# EAGLE board BuildUpon Panel (EAGLE 7.7.0)
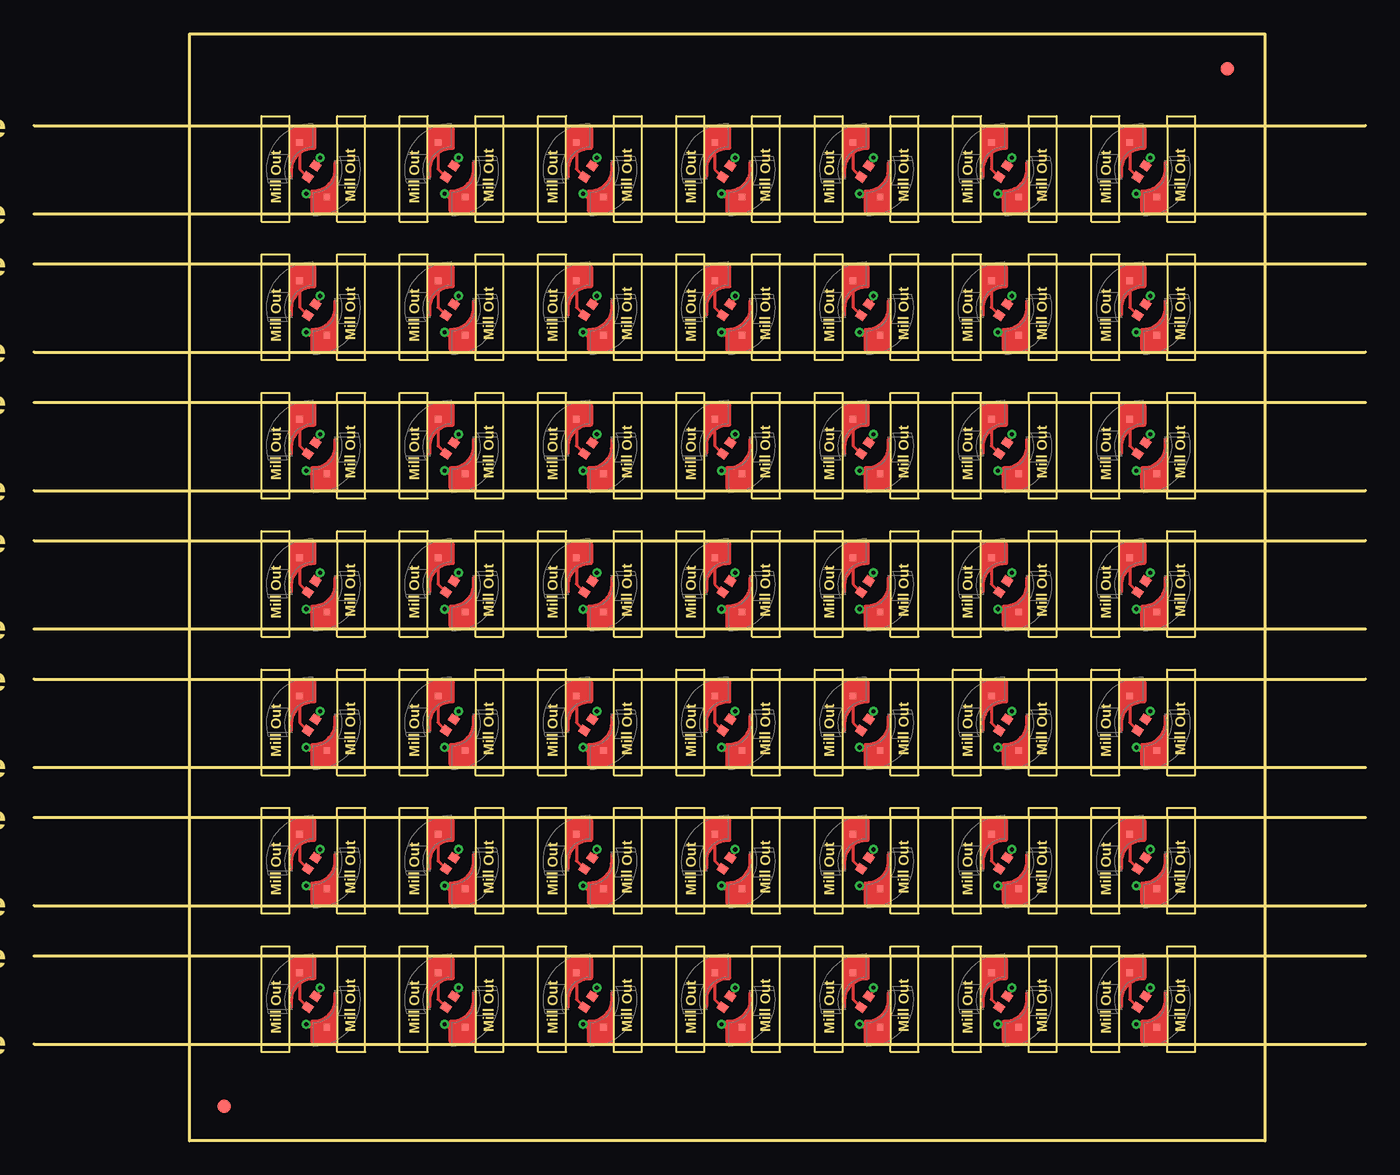
[diagram p0: board, top side]
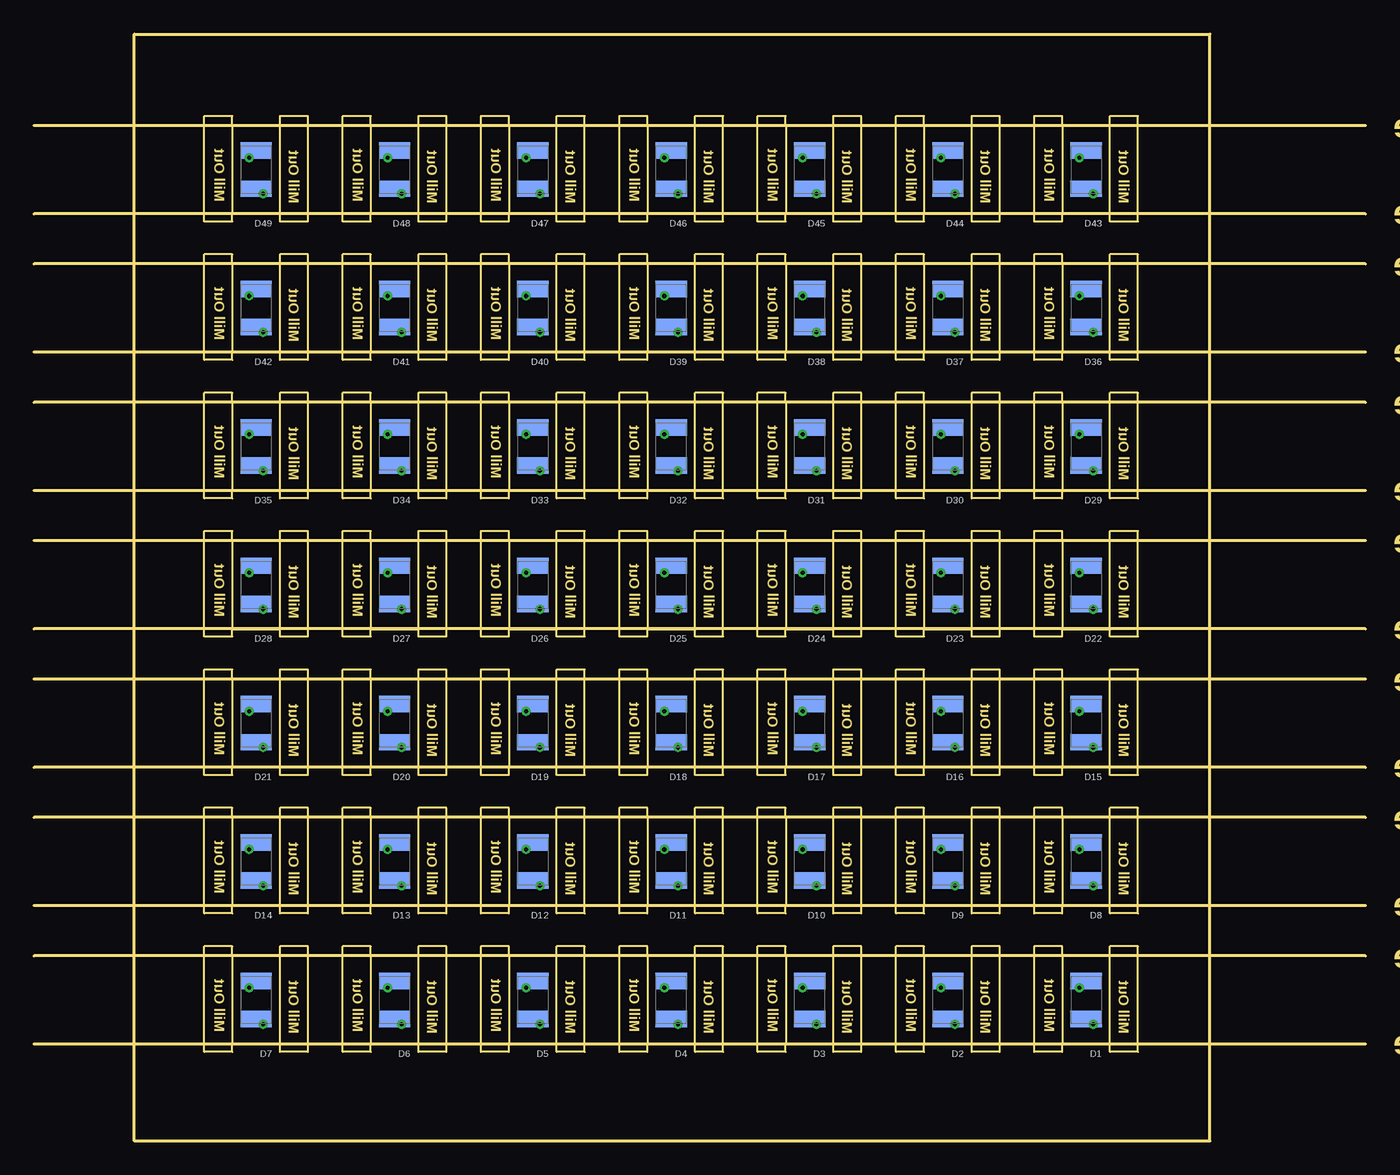
[diagram p1: board, bottom side, seen from below]

Size 97.79 x 81.27 mm. Coordinates in mm from the lower left corner, seen from the top.
Outline: 22.26,13.65 22.26,14.29 24.32,14.29 24.32,6.54 22.26,6.54 22.26,7.05
Outline: 18.76,7.05 18.76,6.54 16.7,6.54 16.7,14.29 18.76,14.29 18.76,13.65
Outline: 0,7.11 97.79,7.11
Outline: 0,13.59 97.79,13.59
Outline: 32.42,13.65 32.42,14.29 34.48,14.29 34.48,6.54 32.42,6.54 32.42,7.05
Outline: 28.92,7.05 28.92,6.54 26.86,6.54 26.86,14.29 28.92,14.29 28.92,13.65
Outline: 42.58,13.65 42.58,14.29 44.64,14.29 44.64,6.54 42.58,6.54 42.58,7.05
Outline: 39.08,7.05 39.08,6.54 37.02,6.54 37.02,14.29 39.08,14.29 39.08,13.65
Outline: 52.74,13.65 52.74,14.29 54.8,14.29 54.8,6.54 52.74,6.54 52.74,7.05
Outline: 49.24,7.05 49.24,6.54 47.18,6.54 47.18,14.29 49.24,14.29 49.24,13.65
Outline: 62.9,13.65 62.9,14.29 64.96,14.29 64.96,6.54 62.9,6.54 62.9,7.05
Outline: 59.4,7.05 59.4,6.54 57.34,6.54 57.34,14.29 59.4,14.29 59.4,13.65
Outline: 73.06,13.65 73.06,14.29 75.12,14.29 75.12,6.54 73.06,6.54 73.06,7.05
Outline: 69.56,7.05 69.56,6.54 67.5,6.54 67.5,14.29 69.56,14.29 69.56,13.65
Outline: 83.22,13.65 83.22,14.29 85.28,14.29 85.28,6.54 83.22,6.54 83.22,7.05
Outline: 79.72,7.05 79.72,6.54 77.66,6.54 77.66,14.29 79.72,14.29 79.72,13.65
Outline: 22.26,23.81 22.26,24.45 24.32,24.45 24.32,16.7 22.26,16.7 22.26,17.21
Outline: 18.76,17.21 18.76,16.7 16.7,16.7 16.7,24.45 18.76,24.45 18.76,23.81
Outline: 0,17.27 97.79,17.27
Outline: 0,23.75 97.79,23.75
Outline: 32.42,23.81 32.42,24.45 34.48,24.45 34.48,16.7 32.42,16.7 32.42,17.21
Outline: 28.92,17.21 28.92,16.7 26.86,16.7 26.86,24.45 28.92,24.45 28.92,23.81
Outline: 42.58,23.81 42.58,24.45 44.64,24.45 44.64,16.7 42.58,16.7 42.58,17.21
Outline: 39.08,17.21 39.08,16.7 37.02,16.7 37.02,24.45 39.08,24.45 39.08,23.81
Outline: 52.74,23.81 52.74,24.45 54.8,24.45 54.8,16.7 52.74,16.7 52.74,17.21
Outline: 49.24,17.21 49.24,16.7 47.18,16.7 47.18,24.45 49.24,24.45 49.24,23.81
Outline: 62.9,23.81 62.9,24.45 64.96,24.45 64.96,16.7 62.9,16.7 62.9,17.21
Outline: 59.4,17.21 59.4,16.7 57.34,16.7 57.34,24.45 59.4,24.45 59.4,23.81
Outline: 73.06,23.81 73.06,24.45 75.12,24.45 75.12,16.7 73.06,16.7 73.06,17.21
Outline: 69.56,17.21 69.56,16.7 67.5,16.7 67.5,24.45 69.56,24.45 69.56,23.81
Outline: 83.22,23.81 83.22,24.45 85.28,24.45 85.28,16.7 83.22,16.7 83.22,17.21
Outline: 79.72,17.21 79.72,16.7 77.66,16.7 77.66,24.45 79.72,24.45 79.72,23.81
Outline: 22.26,33.97 22.26,34.61 24.32,34.61 24.32,26.86 22.26,26.86 22.26,27.37
Outline: 18.76,27.37 18.76,26.86 16.7,26.86 16.7,34.61 18.76,34.61 18.76,33.97
Outline: 0,27.43 97.79,27.43
Outline: 0,33.91 97.79,33.91
Outline: 32.42,33.97 32.42,34.61 34.48,34.61 34.48,26.86 32.42,26.86 32.42,27.37
Outline: 28.92,27.37 28.92,26.86 26.86,26.86 26.86,34.61 28.92,34.61 28.92,33.97
Outline: 42.58,33.97 42.58,34.61 44.64,34.61 44.64,26.86 42.58,26.86 42.58,27.37
Outline: 39.08,27.37 39.08,26.86 37.02,26.86 37.02,34.61 39.08,34.61 39.08,33.97
Outline: 52.74,33.97 52.74,34.61 54.8,34.61 54.8,26.86 52.74,26.86 52.74,27.37
Outline: 49.24,27.37 49.24,26.86 47.18,26.86 47.18,34.61 49.24,34.61 49.24,33.97
Outline: 62.9,33.97 62.9,34.61 64.96,34.61 64.96,26.86 62.9,26.86 62.9,27.37
Outline: 59.4,27.37 59.4,26.86 57.34,26.86 57.34,34.61 59.4,34.61 59.4,33.97
Outline: 73.06,33.97 73.06,34.61 75.12,34.61 75.12,26.86 73.06,26.86 73.06,27.37
Outline: 69.56,27.37 69.56,26.86 67.5,26.86 67.5,34.61 69.56,34.61 69.56,33.97
Outline: 83.22,33.97 83.22,34.61 85.28,34.61 85.28,26.86 83.22,26.86 83.22,27.37
Outline: 79.72,27.37 79.72,26.86 77.66,26.86 77.66,34.61 79.72,34.61 79.72,33.97
Outline: 22.26,44.13 22.26,44.77 24.32,44.77 24.32,37.02 22.26,37.02 22.26,37.53
Outline: 18.76,37.53 18.76,37.02 16.7,37.02 16.7,44.77 18.76,44.77 18.76,44.13
Outline: 0,37.59 97.79,37.59
Outline: 0,44.07 97.79,44.07
Outline: 32.42,44.13 32.42,44.77 34.48,44.77 34.48,37.02 32.42,37.02 32.42,37.53
Outline: 28.92,37.53 28.92,37.02 26.86,37.02 26.86,44.77 28.92,44.77 28.92,44.13
Outline: 42.58,44.13 42.58,44.77 44.64,44.77 44.64,37.02 42.58,37.02 42.58,37.53
Outline: 39.08,37.53 39.08,37.02 37.02,37.02 37.02,44.77 39.08,44.77 39.08,44.13
Outline: 52.74,44.13 52.74,44.77 54.8,44.77 54.8,37.02 52.74,37.02 52.74,37.53
Outline: 49.24,37.53 49.24,37.02 47.18,37.02 47.18,44.77 49.24,44.77 49.24,44.13
Outline: 62.9,44.13 62.9,44.77 64.96,44.77 64.96,37.02 62.9,37.02 62.9,37.53
Outline: 59.4,37.53 59.4,37.02 57.34,37.02 57.34,44.77 59.4,44.77 59.4,44.13
Outline: 73.06,44.13 73.06,44.77 75.12,44.77 75.12,37.02 73.06,37.02 73.06,37.53
Outline: 69.56,37.53 69.56,37.02 67.5,37.02 67.5,44.77 69.56,44.77 69.56,44.13
Outline: 83.22,44.13 83.22,44.77 85.28,44.77 85.28,37.02 83.22,37.02 83.22,37.53
Outline: 79.72,37.53 79.72,37.02 77.66,37.02 77.66,44.77 79.72,44.77 79.72,44.13
Outline: 22.26,54.29 22.26,54.93 24.32,54.93 24.32,47.18 22.26,47.18 22.26,47.69
Outline: 18.76,47.69 18.76,47.18 16.7,47.18 16.7,54.93 18.76,54.93 18.76,54.29
Outline: 0,47.75 97.79,47.75
Outline: 0,54.23 97.79,54.23
Outline: 32.42,54.29 32.42,54.93 34.48,54.93 34.48,47.18 32.42,47.18 32.42,47.69
Outline: 28.92,47.69 28.92,47.18 26.86,47.18 26.86,54.93 28.92,54.93 28.92,54.29
Outline: 42.58,54.29 42.58,54.93 44.64,54.93 44.64,47.18 42.58,47.18 42.58,47.69
Outline: 39.08,47.69 39.08,47.18 37.02,47.18 37.02,54.93 39.08,54.93 39.08,54.29
Outline: 52.74,54.29 52.74,54.93 54.8,54.93 54.8,47.18 52.74,47.18 52.74,47.69
Outline: 49.24,47.69 49.24,47.18 47.18,47.18 47.18,54.93 49.24,54.93 49.24,54.29
Outline: 62.9,54.29 62.9,54.93 64.96,54.93 64.96,47.18 62.9,47.18 62.9,47.69
Outline: 59.4,47.69 59.4,47.18 57.34,47.18 57.34,54.93 59.4,54.93 59.4,54.29
Outline: 73.06,54.29 73.06,54.93 75.12,54.93 75.12,47.18 73.06,47.18 73.06,47.69
Outline: 69.56,47.69 69.56,47.18 67.5,47.18 67.5,54.93 69.56,54.93 69.56,54.29
Outline: 83.22,54.29 83.22,54.93 85.28,54.93 85.28,47.18 83.22,47.18 83.22,47.69
Outline: 79.72,47.69 79.72,47.18 77.66,47.18 77.66,54.93 79.72,54.93 79.72,54.29
Outline: 22.26,64.45 22.26,65.09 24.32,65.09 24.32,57.34 22.26,57.34 22.26,57.85
Outline: 18.76,57.85 18.76,57.34 16.7,57.34 16.7,65.09 18.76,65.09 18.76,64.45
Outline: 0,57.91 97.79,57.91
Outline: 0,64.39 97.79,64.39
Outline: 32.42,64.45 32.42,65.09 34.48,65.09 34.48,57.34 32.42,57.34 32.42,57.85
Outline: 28.92,57.85 28.92,57.34 26.86,57.34 26.86,65.09 28.92,65.09 28.92,64.45
Outline: 42.58,64.45 42.58,65.09 44.64,65.09 44.64,57.34 42.58,57.34 42.58,57.85
Outline: 39.08,57.85 39.08,57.34 37.02,57.34 37.02,65.09 39.08,65.09 39.08,64.45
Outline: 52.74,64.45 52.74,65.09 54.8,65.09 54.8,57.34 52.74,57.34 52.74,57.85
Outline: 49.24,57.85 49.24,57.34 47.18,57.34 47.18,65.09 49.24,65.09 49.24,64.45
Outline: 62.9,64.45 62.9,65.09 64.96,65.09 64.96,57.34 62.9,57.34 62.9,57.85
Outline: 59.4,57.85 59.4,57.34 57.34,57.34 57.34,65.09 59.4,65.09 59.4,64.45
Outline: 73.06,64.45 73.06,65.09 75.12,65.09 75.12,57.34 73.06,57.34 73.06,57.85
Outline: 69.56,57.85 69.56,57.34 67.5,57.34 67.5,65.09 69.56,65.09 69.56,64.45
Outline: 83.22,64.45 83.22,65.09 85.28,65.09 85.28,57.34 83.22,57.34 83.22,57.85
Outline: 79.72,57.85 79.72,57.34 77.66,57.34 77.66,65.09 79.72,65.09 79.72,64.45
Outline: 22.26,74.61 22.26,75.25 24.32,75.25 24.32,67.5 22.26,67.5 22.26,68.01
Outline: 18.76,68.01 18.76,67.5 16.7,67.5 16.7,75.25 18.76,75.25 18.76,74.61
Outline: 0,68.07 97.79,68.07
Outline: 0,74.55 97.79,74.55
Outline: 32.42,74.61 32.42,75.25 34.48,75.25 34.48,67.5 32.42,67.5 32.42,68.01
Outline: 28.92,68.01 28.92,67.5 26.86,67.5 26.86,75.25 28.92,75.25 28.92,74.61
Outline: 42.58,74.61 42.58,75.25 44.64,75.25 44.64,67.5 42.58,67.5 42.58,68.01
Outline: 39.08,68.01 39.08,67.5 37.02,67.5 37.02,75.25 39.08,75.25 39.08,74.61
Outline: 52.74,74.61 52.74,75.25 54.8,75.25 54.8,67.5 52.74,67.5 52.74,68.01
Outline: 49.24,68.01 49.24,67.5 47.18,67.5 47.18,75.25 49.24,75.25 49.24,74.61
Outline: 62.9,74.61 62.9,75.25 64.96,75.25 64.96,67.5 62.9,67.5 62.9,68.01
Outline: 59.4,68.01 59.4,67.5 57.34,67.5 57.34,75.25 59.4,75.25 59.4,74.61
Outline: 73.06,74.61 73.06,75.25 75.12,75.25 75.12,67.5 73.06,67.5 73.06,68.01
Outline: 69.56,68.01 69.56,67.5 67.5,67.5 67.5,75.25 69.56,75.25 69.56,74.61
Outline: 83.22,74.61 83.22,75.25 85.28,75.25 85.28,67.5 83.22,67.5 83.22,68.01
Outline: 79.72,68.01 79.72,67.5 77.66,67.5 77.66,75.25 79.72,75.25 79.72,74.61
Outline: 22.26,7.1 18.76,7.1 18.76,13.6 22.26,13.6 22.26,7.1
Outline: 90.43,0 11.43,0 11.43,81.27 90.43,81.27 90.43,0
Outline: 32.42,7.1 28.92,7.1 28.92,13.6 32.42,13.6 32.42,7.1
Outline: 42.58,7.1 39.08,7.1 39.08,13.6 42.58,13.6 42.58,7.1
Outline: 52.74,7.1 49.24,7.1 49.24,13.6 52.74,13.6 52.74,7.1
Outline: 62.9,7.1 59.4,7.1 59.4,13.6 62.9,13.6 62.9,7.1
Outline: 73.06,7.1 69.56,7.1 69.56,13.6 73.06,13.6 73.06,7.1
Outline: 83.22,7.1 79.72,7.1 79.72,13.6 83.22,13.6 83.22,7.1
Outline: 22.26,17.26 18.76,17.26 18.76,23.76 22.26,23.76 22.26,17.26
Outline: 32.42,17.26 28.92,17.26 28.92,23.76 32.42,23.76 32.42,17.26
Outline: 42.58,17.26 39.08,17.26 39.08,23.76 42.58,23.76 42.58,17.26
Outline: 52.74,17.26 49.24,17.26 49.24,23.76 52.74,23.76 52.74,17.26
Outline: 62.9,17.26 59.4,17.26 59.4,23.76 62.9,23.76 62.9,17.26
Outline: 73.06,17.26 69.56,17.26 69.56,23.76 73.06,23.76 73.06,17.26
Outline: 83.22,17.26 79.72,17.26 79.72,23.76 83.22,23.76 83.22,17.26
Outline: 22.26,27.42 18.76,27.42 18.76,33.92 22.26,33.92 22.26,27.42
Outline: 32.42,27.42 28.92,27.42 28.92,33.92 32.42,33.92 32.42,27.42
Outline: 42.58,27.42 39.08,27.42 39.08,33.92 42.58,33.92 42.58,27.42
Outline: 52.74,27.42 49.24,27.42 49.24,33.92 52.74,33.92 52.74,27.42
Outline: 62.9,27.42 59.4,27.42 59.4,33.92 62.9,33.92 62.9,27.42
Outline: 73.06,27.42 69.56,27.42 69.56,33.92 73.06,33.92 73.06,27.42
Outline: 83.22,27.42 79.72,27.42 79.72,33.92 83.22,33.92 83.22,27.42
Outline: 22.26,37.58 18.76,37.58 18.76,44.08 22.26,44.08 22.26,37.58
Outline: 32.42,37.58 28.92,37.58 28.92,44.08 32.42,44.08 32.42,37.58
Outline: 42.58,37.58 39.08,37.58 39.08,44.08 42.58,44.08 42.58,37.58
Outline: 52.74,37.58 49.24,37.58 49.24,44.08 52.74,44.08 52.74,37.58
Outline: 62.9,37.58 59.4,37.58 59.4,44.08 62.9,44.08 62.9,37.58
Outline: 73.06,37.58 69.56,37.58 69.56,44.08 73.06,44.08 73.06,37.58
Outline: 83.22,37.58 79.72,37.58 79.72,44.08 83.22,44.08 83.22,37.58
Outline: 22.26,47.74 18.76,47.74 18.76,54.24 22.26,54.24 22.26,47.74
Outline: 32.42,47.74 28.92,47.74 28.92,54.24 32.42,54.24 32.42,47.74
Outline: 42.58,47.74 39.08,47.74 39.08,54.24 42.58,54.24 42.58,47.74
Outline: 52.74,47.74 49.24,47.74 49.24,54.24 52.74,54.24 52.74,47.74
Outline: 62.9,47.74 59.4,47.74 59.4,54.24 62.9,54.24 62.9,47.74
Outline: 73.06,47.74 69.56,47.74 69.56,54.24 73.06,54.24 73.06,47.74
Outline: 83.22,47.74 79.72,47.74 79.72,54.24 83.22,54.24 83.22,47.74
Outline: 22.26,57.9 18.76,57.9 18.76,64.4 22.26,64.4 22.26,57.9
Outline: 32.42,57.9 28.92,57.9 28.92,64.4 32.42,64.4 32.42,57.9
Outline: 42.58,57.9 39.08,57.9 39.08,64.4 42.58,64.4 42.58,57.9
Outline: 52.74,57.9 49.24,57.9 49.24,64.4 52.74,64.4 52.74,57.9
Outline: 62.9,57.9 59.4,57.9 59.4,64.4 62.9,64.4 62.9,57.9
Outline: 73.06,57.9 69.56,57.9 69.56,64.4 73.06,64.4 73.06,57.9
Outline: 83.22,57.9 79.72,57.9 79.72,64.4 83.22,64.4 83.22,57.9
Outline: 22.26,68.06 18.76,68.06 18.76,74.56 22.26,74.56 22.26,68.06
Outline: 32.42,68.06 28.92,68.06 28.92,74.56 32.42,74.56 32.42,68.06
Outline: 42.58,68.06 39.08,68.06 39.08,74.56 42.58,74.56 42.58,68.06
Outline: 52.74,68.06 49.24,68.06 49.24,74.56 52.74,74.56 52.74,68.06
Outline: 62.9,68.06 59.4,68.06 59.4,74.56 62.9,74.56 62.9,68.06
Outline: 73.06,68.06 69.56,68.06 69.56,74.56 73.06,74.56 73.06,68.06
Outline: 83.22,68.06 79.72,68.06 79.72,74.56 83.22,74.56 83.22,68.06
Copper layers (1*16): Top 0.035mm / dielectric 1.5mm / Bottom 0.035mm
Design rules "SparkFun-2-layer-TIGHT": minimum track width 7mil, minimum drill 15mil, track to track 7mil, track to pad 7mil, pad to pad 7mil, via to via 7mil, smd to smd 7mil, copper to edge 7mil, drill to drill 7mil, minimum pad ring 7mil, minimum via ring 7mil, stop-mask expansion 4mil, vias tented up to drill 25mil, thermal gap 10mil

## Footprints (pad centres in the part's own frame; a part is rotated, then mirrored left to right if it is on the bottom)
BIDIRECTIONAL-LED = smd 2.3 x 1.2: LED1 0,1.4; LED2 0,-1.4
FIDUCIAL-1X2 = smd 1 x 1: 1 0,0
METAL-LEG-LESSPASTE = smd 0.5 x 0.5: 1 -1,2
0402 = smd 0.6 x 0.7: 1 -0.5,0; 2 0.5,0

## Placement (x,y rotation side)
D1  BIDIRECTIONAL-LED  [BIDIRECTIONAL-LED]  20.51,10.35 180 bottom
D2  BIDIRECTIONAL-LED  [BIDIRECTIONAL-LED]  30.67,10.35 180 bottom
D3  BIDIRECTIONAL-LED  [BIDIRECTIONAL-LED]  40.83,10.35 180 bottom
D4  BIDIRECTIONAL-LED  [BIDIRECTIONAL-LED]  50.99,10.35 180 bottom
D5  BIDIRECTIONAL-LED  [BIDIRECTIONAL-LED]  61.15,10.35 180 bottom
D6  BIDIRECTIONAL-LED  [BIDIRECTIONAL-LED]  71.31,10.35 180 bottom
D7  BIDIRECTIONAL-LED  [BIDIRECTIONAL-LED]  81.47,10.35 180 bottom
D8  BIDIRECTIONAL-LED  [BIDIRECTIONAL-LED]  20.51,20.51 180 bottom
D9  BIDIRECTIONAL-LED  [BIDIRECTIONAL-LED]  30.67,20.51 180 bottom
D10  BIDIRECTIONAL-LED  [BIDIRECTIONAL-LED]  40.83,20.51 180 bottom
D11  BIDIRECTIONAL-LED  [BIDIRECTIONAL-LED]  50.99,20.51 180 bottom
D12  BIDIRECTIONAL-LED  [BIDIRECTIONAL-LED]  61.15,20.51 180 bottom
D13  BIDIRECTIONAL-LED  [BIDIRECTIONAL-LED]  71.31,20.51 180 bottom
D14  BIDIRECTIONAL-LED  [BIDIRECTIONAL-LED]  81.47,20.51 180 bottom
D15  BIDIRECTIONAL-LED  [BIDIRECTIONAL-LED]  20.51,30.67 180 bottom
D16  BIDIRECTIONAL-LED  [BIDIRECTIONAL-LED]  30.67,30.67 180 bottom
D17  BIDIRECTIONAL-LED  [BIDIRECTIONAL-LED]  40.83,30.67 180 bottom
D18  BIDIRECTIONAL-LED  [BIDIRECTIONAL-LED]  50.99,30.67 180 bottom
D19  BIDIRECTIONAL-LED  [BIDIRECTIONAL-LED]  61.15,30.67 180 bottom
D20  BIDIRECTIONAL-LED  [BIDIRECTIONAL-LED]  71.31,30.67 180 bottom
D21  BIDIRECTIONAL-LED  [BIDIRECTIONAL-LED]  81.47,30.67 180 bottom
D22  BIDIRECTIONAL-LED  [BIDIRECTIONAL-LED]  20.51,40.83 180 bottom
D23  BIDIRECTIONAL-LED  [BIDIRECTIONAL-LED]  30.67,40.83 180 bottom
D24  BIDIRECTIONAL-LED  [BIDIRECTIONAL-LED]  40.83,40.83 180 bottom
D25  BIDIRECTIONAL-LED  [BIDIRECTIONAL-LED]  50.99,40.83 180 bottom
D26  BIDIRECTIONAL-LED  [BIDIRECTIONAL-LED]  61.15,40.83 180 bottom
D27  BIDIRECTIONAL-LED  [BIDIRECTIONAL-LED]  71.31,40.83 180 bottom
D28  BIDIRECTIONAL-LED  [BIDIRECTIONAL-LED]  81.47,40.83 180 bottom
D29  BIDIRECTIONAL-LED  [BIDIRECTIONAL-LED]  20.51,50.99 180 bottom
D30  BIDIRECTIONAL-LED  [BIDIRECTIONAL-LED]  30.67,50.99 180 bottom
D31  BIDIRECTIONAL-LED  [BIDIRECTIONAL-LED]  40.83,50.99 180 bottom
D32  BIDIRECTIONAL-LED  [BIDIRECTIONAL-LED]  50.99,50.99 180 bottom
D33  BIDIRECTIONAL-LED  [BIDIRECTIONAL-LED]  61.15,50.99 180 bottom
D34  BIDIRECTIONAL-LED  [BIDIRECTIONAL-LED]  71.31,50.99 180 bottom
D35  BIDIRECTIONAL-LED  [BIDIRECTIONAL-LED]  81.47,50.99 180 bottom
D36  BIDIRECTIONAL-LED  [BIDIRECTIONAL-LED]  20.51,61.15 180 bottom
D37  BIDIRECTIONAL-LED  [BIDIRECTIONAL-LED]  30.67,61.15 180 bottom
D38  BIDIRECTIONAL-LED  [BIDIRECTIONAL-LED]  40.83,61.15 180 bottom
D39  BIDIRECTIONAL-LED  [BIDIRECTIONAL-LED]  50.99,61.15 180 bottom
D40  BIDIRECTIONAL-LED  [BIDIRECTIONAL-LED]  61.15,61.15 180 bottom
D41  BIDIRECTIONAL-LED  [BIDIRECTIONAL-LED]  71.31,61.15 180 bottom
D42  BIDIRECTIONAL-LED  [BIDIRECTIONAL-LED]  81.47,61.15 180 bottom
D43  BIDIRECTIONAL-LED  [BIDIRECTIONAL-LED]  20.51,71.31 180 bottom
D44  BIDIRECTIONAL-LED  [BIDIRECTIONAL-LED]  30.67,71.31 180 bottom
D45  BIDIRECTIONAL-LED  [BIDIRECTIONAL-LED]  40.83,71.31 180 bottom
D46  BIDIRECTIONAL-LED  [BIDIRECTIONAL-LED]  50.99,71.31 180 bottom
D47  BIDIRECTIONAL-LED  [BIDIRECTIONAL-LED]  61.15,71.31 180 bottom
D48  BIDIRECTIONAL-LED  [BIDIRECTIONAL-LED]  71.31,71.31 180 bottom
D49  BIDIRECTIONAL-LED  [BIDIRECTIONAL-LED]  81.47,71.31 180 bottom
E$1  [FIDUCIAL-1X2]  13.97,2.54 0 top
E$2  [FIDUCIAL-1X2]  87.63,78.74 0 top
J1  METAL-LEG  [METAL-LEG-LESSPASTE]  20.51,10.35 180 top
J2  METAL-LEG  [METAL-LEG-LESSPASTE]  20.51,10.35 0 top
J3  METAL-LEG  [METAL-LEG-LESSPASTE]  30.67,10.35 180 top
J4  METAL-LEG  [METAL-LEG-LESSPASTE]  30.67,10.35 0 top
J5  METAL-LEG  [METAL-LEG-LESSPASTE]  40.83,10.35 180 top
J6  METAL-LEG  [METAL-LEG-LESSPASTE]  40.83,10.35 0 top
J7  METAL-LEG  [METAL-LEG-LESSPASTE]  50.99,10.35 180 top
J8  METAL-LEG  [METAL-LEG-LESSPASTE]  50.99,10.35 0 top
J9  METAL-LEG  [METAL-LEG-LESSPASTE]  61.15,10.35 180 top
J10  METAL-LEG  [METAL-LEG-LESSPASTE]  61.15,10.35 0 top
J11  METAL-LEG  [METAL-LEG-LESSPASTE]  71.31,10.35 180 top
J12  METAL-LEG  [METAL-LEG-LESSPASTE]  71.31,10.35 0 top
J13  METAL-LEG  [METAL-LEG-LESSPASTE]  81.47,10.35 180 top
J14  METAL-LEG  [METAL-LEG-LESSPASTE]  81.47,10.35 0 top
J15  METAL-LEG  [METAL-LEG-LESSPASTE]  20.51,20.51 180 top
J16  METAL-LEG  [METAL-LEG-LESSPASTE]  20.51,20.51 0 top
J17  METAL-LEG  [METAL-LEG-LESSPASTE]  30.67,20.51 180 top
J18  METAL-LEG  [METAL-LEG-LESSPASTE]  30.67,20.51 0 top
J19  METAL-LEG  [METAL-LEG-LESSPASTE]  40.83,20.51 180 top
J20  METAL-LEG  [METAL-LEG-LESSPASTE]  40.83,20.51 0 top
J21  METAL-LEG  [METAL-LEG-LESSPASTE]  50.99,20.51 180 top
J22  METAL-LEG  [METAL-LEG-LESSPASTE]  50.99,20.51 0 top
J23  METAL-LEG  [METAL-LEG-LESSPASTE]  61.15,20.51 180 top
J24  METAL-LEG  [METAL-LEG-LESSPASTE]  61.15,20.51 0 top
J25  METAL-LEG  [METAL-LEG-LESSPASTE]  71.31,20.51 180 top
J26  METAL-LEG  [METAL-LEG-LESSPASTE]  71.31,20.51 0 top
J27  METAL-LEG  [METAL-LEG-LESSPASTE]  81.47,20.51 180 top
J28  METAL-LEG  [METAL-LEG-LESSPASTE]  81.47,20.51 0 top
J29  METAL-LEG  [METAL-LEG-LESSPASTE]  20.51,30.67 180 top
J30  METAL-LEG  [METAL-LEG-LESSPASTE]  20.51,30.67 0 top
J31  METAL-LEG  [METAL-LEG-LESSPASTE]  30.67,30.67 180 top
J32  METAL-LEG  [METAL-LEG-LESSPASTE]  30.67,30.67 0 top
J33  METAL-LEG  [METAL-LEG-LESSPASTE]  40.83,30.67 180 top
J34  METAL-LEG  [METAL-LEG-LESSPASTE]  40.83,30.67 0 top
J35  METAL-LEG  [METAL-LEG-LESSPASTE]  50.99,30.67 180 top
J36  METAL-LEG  [METAL-LEG-LESSPASTE]  50.99,30.67 0 top
J37  METAL-LEG  [METAL-LEG-LESSPASTE]  61.15,30.67 180 top
J38  METAL-LEG  [METAL-LEG-LESSPASTE]  61.15,30.67 0 top
J39  METAL-LEG  [METAL-LEG-LESSPASTE]  71.31,30.67 180 top
J40  METAL-LEG  [METAL-LEG-LESSPASTE]  71.31,30.67 0 top
J41  METAL-LEG  [METAL-LEG-LESSPASTE]  81.47,30.67 180 top
J42  METAL-LEG  [METAL-LEG-LESSPASTE]  81.47,30.67 0 top
J43  METAL-LEG  [METAL-LEG-LESSPASTE]  20.51,40.83 180 top
J44  METAL-LEG  [METAL-LEG-LESSPASTE]  20.51,40.83 0 top
J45  METAL-LEG  [METAL-LEG-LESSPASTE]  30.67,40.83 180 top
J46  METAL-LEG  [METAL-LEG-LESSPASTE]  30.67,40.83 0 top
J47  METAL-LEG  [METAL-LEG-LESSPASTE]  40.83,40.83 180 top
J48  METAL-LEG  [METAL-LEG-LESSPASTE]  40.83,40.83 0 top
J49  METAL-LEG  [METAL-LEG-LESSPASTE]  50.99,40.83 180 top
J50  METAL-LEG  [METAL-LEG-LESSPASTE]  50.99,40.83 0 top
J51  METAL-LEG  [METAL-LEG-LESSPASTE]  61.15,40.83 180 top
J52  METAL-LEG  [METAL-LEG-LESSPASTE]  61.15,40.83 0 top
J53  METAL-LEG  [METAL-LEG-LESSPASTE]  71.31,40.83 180 top
J54  METAL-LEG  [METAL-LEG-LESSPASTE]  71.31,40.83 0 top
J55  METAL-LEG  [METAL-LEG-LESSPASTE]  81.47,40.83 180 top
J56  METAL-LEG  [METAL-LEG-LESSPASTE]  81.47,40.83 0 top
J57  METAL-LEG  [METAL-LEG-LESSPASTE]  20.51,50.99 180 top
J58  METAL-LEG  [METAL-LEG-LESSPASTE]  20.51,50.99 0 top
J59  METAL-LEG  [METAL-LEG-LESSPASTE]  30.67,50.99 180 top
J60  METAL-LEG  [METAL-LEG-LESSPASTE]  30.67,50.99 0 top
J61  METAL-LEG  [METAL-LEG-LESSPASTE]  40.83,50.99 180 top
J62  METAL-LEG  [METAL-LEG-LESSPASTE]  40.83,50.99 0 top
J63  METAL-LEG  [METAL-LEG-LESSPASTE]  50.99,50.99 180 top
J64  METAL-LEG  [METAL-LEG-LESSPASTE]  50.99,50.99 0 top
J65  METAL-LEG  [METAL-LEG-LESSPASTE]  61.15,50.99 180 top
J66  METAL-LEG  [METAL-LEG-LESSPASTE]  61.15,50.99 0 top
J67  METAL-LEG  [METAL-LEG-LESSPASTE]  71.31,50.99 180 top
J68  METAL-LEG  [METAL-LEG-LESSPASTE]  71.31,50.99 0 top
J69  METAL-LEG  [METAL-LEG-LESSPASTE]  81.47,50.99 180 top
J70  METAL-LEG  [METAL-LEG-LESSPASTE]  81.47,50.99 0 top
J71  METAL-LEG  [METAL-LEG-LESSPASTE]  20.51,61.15 180 top
J72  METAL-LEG  [METAL-LEG-LESSPASTE]  20.51,61.15 0 top
J73  METAL-LEG  [METAL-LEG-LESSPASTE]  30.67,61.15 180 top
J74  METAL-LEG  [METAL-LEG-LESSPASTE]  30.67,61.15 0 top
J75  METAL-LEG  [METAL-LEG-LESSPASTE]  40.83,61.15 180 top
J76  METAL-LEG  [METAL-LEG-LESSPASTE]  40.83,61.15 0 top
J77  METAL-LEG  [METAL-LEG-LESSPASTE]  50.99,61.15 180 top
J78  METAL-LEG  [METAL-LEG-LESSPASTE]  50.99,61.15 0 top
J79  METAL-LEG  [METAL-LEG-LESSPASTE]  61.15,61.15 180 top
J80  METAL-LEG  [METAL-LEG-LESSPASTE]  61.15,61.15 0 top
J81  METAL-LEG  [METAL-LEG-LESSPASTE]  71.31,61.15 180 top
J82  METAL-LEG  [METAL-LEG-LESSPASTE]  71.31,61.15 0 top
J83  METAL-LEG  [METAL-LEG-LESSPASTE]  81.47,61.15 180 top
J84  METAL-LEG  [METAL-LEG-LESSPASTE]  81.47,61.15 0 top
J85  METAL-LEG  [METAL-LEG-LESSPASTE]  20.51,71.31 180 top
J86  METAL-LEG  [METAL-LEG-LESSPASTE]  20.51,71.31 0 top
J87  METAL-LEG  [METAL-LEG-LESSPASTE]  30.67,71.31 180 top
J88  METAL-LEG  [METAL-LEG-LESSPASTE]  30.67,71.31 0 top
J89  METAL-LEG  [METAL-LEG-LESSPASTE]  40.83,71.31 180 top
J90  METAL-LEG  [METAL-LEG-LESSPASTE]  40.83,71.31 0 top
J91  METAL-LEG  [METAL-LEG-LESSPASTE]  50.99,71.31 180 top
J92  METAL-LEG  [METAL-LEG-LESSPASTE]  50.99,71.31 0 top
J93  METAL-LEG  [METAL-LEG-LESSPASTE]  61.15,71.31 180 top
J94  METAL-LEG  [METAL-LEG-LESSPASTE]  61.15,71.31 0 top
J95  METAL-LEG  [METAL-LEG-LESSPASTE]  71.31,71.31 180 top
J96  METAL-LEG  [METAL-LEG-LESSPASTE]  71.31,71.31 0 top
J97  METAL-LEG  [METAL-LEG-LESSPASTE]  81.47,71.31 180 top
J98  METAL-LEG  [METAL-LEG-LESSPASTE]  81.47,71.31 0 top
R1  120  [0402]  30.54,10.22 235 top
R2  120  [0402]  20.38,10.22 235 top
R3  120  [0402]  40.7,10.22 235 top
R4  120  [0402]  50.86,10.22 235 top
R5  120  [0402]  61.02,10.22 235 top
R6  120  [0402]  71.18,10.22 235 top
R7  120  [0402]  81.34,10.22 235 top
R8  120  [0402]  20.38,20.38 235 top
R9  120  [0402]  30.54,20.38 235 top
R10  120  [0402]  40.7,20.38 235 top
R11  120  [0402]  50.86,20.38 235 top
R12  120  [0402]  61.02,20.38 235 top
R13  120  [0402]  71.18,20.38 235 top
R14  120  [0402]  81.34,20.38 235 top
R15  120  [0402]  20.38,30.54 235 top
R16  120  [0402]  30.54,30.54 235 top
R17  120  [0402]  40.7,30.54 235 top
R18  120  [0402]  50.86,30.54 235 top
R19  120  [0402]  61.02,30.54 235 top
R20  120  [0402]  71.18,30.54 235 top
R21  120  [0402]  81.34,30.54 235 top
R22  120  [0402]  20.38,40.7 235 top
R23  120  [0402]  30.54,40.7 235 top
R24  120  [0402]  40.7,40.7 235 top
R25  120  [0402]  50.86,40.7 235 top
R26  120  [0402]  61.02,40.7 235 top
R27  120  [0402]  71.18,40.7 235 top
R28  120  [0402]  81.34,40.7 235 top
R29  120  [0402]  20.38,50.86 235 top
R30  120  [0402]  30.54,50.86 235 top
R31  120  [0402]  40.7,50.86 235 top
R32  120  [0402]  50.86,50.86 235 top
R33  120  [0402]  61.02,50.86 235 top
R34  120  [0402]  71.18,50.86 235 top
R35  120  [0402]  81.34,50.86 235 top
R36  120  [0402]  20.38,61.02 235 top
R37  120  [0402]  30.54,61.02 235 top
R38  120  [0402]  40.7,61.02 235 top
R39  120  [0402]  50.86,61.02 235 top
R40  120  [0402]  61.02,61.02 235 top
R41  120  [0402]  71.18,61.02 235 top
R42  120  [0402]  81.34,61.02 235 top
R43  120  [0402]  20.38,71.18 235 top
R44  120  [0402]  30.54,71.18 235 top
R45  120  [0402]  40.7,71.18 235 top
R46  120  [0402]  50.86,71.18 235 top
R47  120  [0402]  61.02,71.18 235 top
R48  120  [0402]  71.18,71.18 235 top
R49  120  [0402]  81.34,71.18 235 top

## Library data of the parts
D1-D49 J1-J98 R1-R49 = BuildUpons
E$1 E$2 = SparkFun-Aesthetics

## Nets
LEG1: D1.LED1 J1.1
LEG2: J2.1 R2.2
LEG3: D2.LED1 J3.1
LEG4: J4.1 R1.2
LEG5: D3.LED1 J5.1
LEG6: J6.1 R3.2
LEG7: D4.LED1 J7.1
LEG8: J8.1 R4.2
LEG9: D5.LED1 J9.1
LEG10: J10.1 R5.2
LEG11: D6.LED1 J11.1
LEG12: J12.1 R6.2
LEG13: D7.LED1 J13.1
LEG14: J14.1 R7.2
LEG15: D8.LED1 J15.1
LEG16: J16.1 R8.2
LEG17: D9.LED1 J17.1
LEG18: J18.1 R9.2
LEG19: D10.LED1 J19.1
LEG20: J20.1 R10.2
LEG21: D11.LED1 J21.1
LEG22: J22.1 R11.2
LEG23: D12.LED1 J23.1
LEG24: J24.1 R12.2
LEG25: D13.LED1 J25.1
LEG26: J26.1 R13.2
LEG27: D14.LED1 J27.1
LEG28: J28.1 R14.2
LEG29: D15.LED1 J29.1
LEG30: J30.1 R15.2
LEG31: D16.LED1 J31.1
LEG32: J32.1 R16.2
LEG33: D17.LED1 J33.1
LEG34: J34.1 R17.2
LEG35: D18.LED1 J35.1
LEG36: J36.1 R18.2
LEG37: D19.LED1 J37.1
LEG38: J38.1 R19.2
LEG39: D20.LED1 J39.1
LEG40: J40.1 R20.2
LEG41: D21.LED1 J41.1
LEG42: J42.1 R21.2
LEG43: D22.LED1 J43.1
LEG44: J44.1 R22.2
LEG45: D23.LED1 J45.1
LEG46: J46.1 R23.2
LEG47: D24.LED1 J47.1
LEG48: J48.1 R24.2
LEG49: D25.LED1 J49.1
LEG50: J50.1 R25.2
LEG51: D26.LED1 J51.1
LEG52: J52.1 R26.2
LEG53: D27.LED1 J53.1
LEG54: J54.1 R27.2
LEG55: D28.LED1 J55.1
LEG56: J56.1 R28.2
LEG57: D29.LED1 J57.1
LEG58: J58.1 R29.2
LEG59: D30.LED1 J59.1
LEG60: J60.1 R30.2
LEG61: D31.LED1 J61.1
LEG62: J62.1 R31.2
LEG63: D32.LED1 J63.1
LEG64: J64.1 R32.2
LEG65: D33.LED1 J65.1
LEG66: J66.1 R33.2
LEG67: D34.LED1 J67.1
LEG68: J68.1 R34.2
LEG69: D35.LED1 J69.1
LEG70: J70.1 R35.2
LEG71: D36.LED1 J71.1
LEG72: J72.1 R36.2
LEG73: D37.LED1 J73.1
LEG74: J74.1 R37.2
LEG75: D38.LED1 J75.1
LEG76: J76.1 R38.2
LEG77: D39.LED1 J77.1
LEG78: J78.1 R39.2
LEG79: D40.LED1 J79.1
LEG80: J80.1 R40.2
LEG81: D41.LED1 J81.1
LEG82: J82.1 R41.2
LEG83: D42.LED1 J83.1
LEG84: J84.1 R42.2
LEG85: D43.LED1 J85.1
LEG86: J86.1 R43.2
LEG87: D44.LED1 J87.1
LEG88: J88.1 R44.2
LEG89: D45.LED1 J89.1
LEG90: J90.1 R45.2
LEG91: D46.LED1 J91.1
LEG92: J92.1 R46.2
LEG93: D47.LED1 J93.1
LEG94: J94.1 R47.2
LEG95: D48.LED1 J95.1
LEG96: J96.1 R48.2
LEG97: D49.LED1 J97.1
LEG98: J98.1 R49.2
RLEG1: D2.LED2 R1.1
RLEG2: D1.LED2 R2.1
RLEG3: D3.LED2 R3.1
RLEG4: D4.LED2 R4.1
RLEG5: D5.LED2 R5.1
RLEG6: D6.LED2 R6.1
RLEG7: D7.LED2 R7.1
RLEG8: D8.LED2 R8.1
RLEG9: D9.LED2 R9.1
RLEG10: D10.LED2 R10.1
RLEG11: D11.LED2 R11.1
RLEG12: D12.LED2 R12.1
RLEG13: D13.LED2 R13.1
RLEG14: D14.LED2 R14.1
RLEG15: D15.LED2 R15.1
RLEG16: D16.LED2 R16.1
RLEG17: D17.LED2 R17.1
RLEG18: D18.LED2 R18.1
RLEG19: D19.LED2 R19.1
RLEG20: D20.LED2 R20.1
RLEG21: D21.LED2 R21.1
RLEG22: D22.LED2 R22.1
RLEG23: D23.LED2 R23.1
RLEG24: D24.LED2 R24.1
RLEG25: D25.LED2 R25.1
RLEG26: D26.LED2 R26.1
RLEG27: D27.LED2 R27.1
RLEG28: D28.LED2 R28.1
RLEG29: D29.LED2 R29.1
RLEG30: D30.LED2 R30.1
RLEG31: D31.LED2 R31.1
RLEG32: D32.LED2 R32.1
RLEG33: D33.LED2 R33.1
RLEG34: D34.LED2 R34.1
RLEG35: D35.LED2 R35.1
RLEG36: D36.LED2 R36.1
RLEG37: D37.LED2 R37.1
RLEG38: D38.LED2 R38.1
RLEG39: D39.LED2 R39.1
RLEG40: D40.LED2 R40.1
RLEG41: D41.LED2 R41.1
RLEG42: D42.LED2 R42.1
RLEG43: D43.LED2 R43.1
RLEG44: D44.LED2 R44.1
RLEG45: D45.LED2 R45.1
RLEG46: D46.LED2 R46.1
RLEG47: D47.LED2 R47.1
RLEG48: D48.LED2 R48.1
RLEG49: D49.LED2 R49.1

## Tracks (layer width: path | path; a pad name or v marks a point on that pad's centre or on a via)
LEG1  (via drill 0.3)
  Top 0.203: J1.1 20.22,8.35 v20,8.57
  Bottom 0.203: D1.LED1 20.08,8.65 v20,8.57
LEG2
  Top 0.203: J2.1 19.51,10.4 R2.2
LEG3  (via drill 0.3)
  Top 0.203: J3.1 30.38,8.35 v30.16,8.57
  Bottom 0.203: D2.LED1 30.24,8.65 v30.16,8.57
LEG4
  Top 0.203: J4.1 29.67,10.4 R1.2
LEG5  (via drill 0.3)
  Top 0.203: J5.1 40.54,8.35 v40.32,8.57
  Bottom 0.203: D3.LED1 40.4,8.65 v40.32,8.57
LEG6
  Top 0.203: J6.1 39.83,10.4 R3.2
LEG7  (via drill 0.3)
  Top 0.203: J7.1 50.7,8.35 v50.48,8.57
  Bottom 0.203: D4.LED1 50.56,8.65 v50.48,8.57
LEG8
  Top 0.203: J8.1 49.99,10.4 R4.2
LEG9  (via drill 0.3)
  Top 0.203: J9.1 60.86,8.35 v60.64,8.57
  Bottom 0.203: D5.LED1 60.72,8.65 v60.64,8.57
LEG10
  Top 0.203: J10.1 60.15,10.4 R5.2
LEG11  (via drill 0.3)
  Top 0.203: J11.1 71.02,8.35 v70.8,8.57
  Bottom 0.203: D6.LED1 70.88,8.65 v70.8,8.57
LEG12
  Top 0.203: J12.1 70.31,10.4 R6.2
LEG13  (via drill 0.3)
  Top 0.203: J13.1 81.18,8.35 v80.96,8.57
  Bottom 0.203: D7.LED1 81.04,8.65 v80.96,8.57
LEG14
  Top 0.203: J14.1 80.47,10.4 R7.2
LEG15  (via drill 0.3)
  Top 0.203: J15.1 20.22,18.51 v20,18.73
  Bottom 0.203: D8.LED1 20.08,18.81 v20,18.73
LEG16
  Top 0.203: J16.1 19.51,20.56 R8.2
LEG17  (via drill 0.3)
  Top 0.203: J17.1 30.38,18.51 v30.16,18.73
  Bottom 0.203: D9.LED1 30.24,18.81 v30.16,18.73
LEG18
  Top 0.203: J18.1 29.67,20.56 R9.2
LEG19  (via drill 0.3)
  Top 0.203: J19.1 40.54,18.51 v40.32,18.73
  Bottom 0.203: D10.LED1 40.4,18.81 v40.32,18.73
LEG20
  Top 0.203: J20.1 39.83,20.56 R10.2
LEG21  (via drill 0.3)
  Top 0.203: J21.1 50.7,18.51 v50.48,18.73
  Bottom 0.203: D11.LED1 50.56,18.81 v50.48,18.73
LEG22
  Top 0.203: J22.1 49.99,20.56 R11.2
LEG23  (via drill 0.3)
  Top 0.203: J23.1 60.86,18.51 v60.64,18.73
  Bottom 0.203: D12.LED1 60.72,18.81 v60.64,18.73
LEG24
  Top 0.203: J24.1 60.15,20.56 R12.2
LEG25  (via drill 0.3)
  Top 0.203: J25.1 71.02,18.51 v70.8,18.73
  Bottom 0.203: D13.LED1 70.88,18.81 v70.8,18.73
LEG26
  Top 0.203: J26.1 70.31,20.56 R13.2
LEG27  (via drill 0.3)
  Top 0.203: J27.1 81.18,18.51 v80.96,18.73
  Bottom 0.203: D14.LED1 81.04,18.81 v80.96,18.73
LEG28
  Top 0.203: J28.1 80.47,20.56 R14.2
LEG29  (via drill 0.3)
  Top 0.203: J29.1 20.22,28.67 v20,28.89
  Bottom 0.203: D15.LED1 20.08,28.97 v20,28.89
LEG30
  Top 0.203: J30.1 19.51,30.72 R15.2
LEG31  (via drill 0.3)
  Top 0.203: J31.1 30.38,28.67 v30.16,28.89
  Bottom 0.203: D16.LED1 30.24,28.97 v30.16,28.89
LEG32
  Top 0.203: J32.1 29.67,30.72 R16.2
LEG33  (via drill 0.3)
  Top 0.203: J33.1 40.54,28.67 v40.32,28.89
  Bottom 0.203: D17.LED1 40.4,28.97 v40.32,28.89
LEG34
  Top 0.203: J34.1 39.83,30.72 R17.2
LEG35  (via drill 0.3)
  Top 0.203: J35.1 50.7,28.67 v50.48,28.89
  Bottom 0.203: D18.LED1 50.56,28.97 v50.48,28.89
LEG36
  Top 0.203: J36.1 49.99,30.72 R18.2
LEG37  (via drill 0.3)
  Top 0.203: J37.1 60.86,28.67 v60.64,28.89
  Bottom 0.203: D19.LED1 60.72,28.97 v60.64,28.89
LEG38
  Top 0.203: J38.1 60.15,30.72 R19.2
LEG39  (via drill 0.3)
  Top 0.203: J39.1 71.02,28.67 v70.8,28.89
  Bottom 0.203: D20.LED1 70.88,28.97 v70.8,28.89
LEG40
  Top 0.203: J40.1 70.31,30.72 R20.2
LEG41  (via drill 0.3)
  Top 0.203: J41.1 81.18,28.67 v80.96,28.89
  Bottom 0.203: D21.LED1 81.04,28.97 v80.96,28.89
LEG42
  Top 0.203: J42.1 80.47,30.72 R21.2
LEG43  (via drill 0.3)
  Top 0.203: J43.1 20.22,38.83 v20,39.05
  Bottom 0.203: D22.LED1 20.08,39.13 v20,39.05
LEG44
  Top 0.203: J44.1 19.51,40.88 R22.2
LEG45  (via drill 0.3)
  Top 0.203: J45.1 30.38,38.83 v30.16,39.05
  Bottom 0.203: D23.LED1 30.24,39.13 v30.16,39.05
LEG46
  Top 0.203: J46.1 29.67,40.88 R23.2
LEG47  (via drill 0.3)
  Top 0.203: J47.1 40.54,38.83 v40.32,39.05
  Bottom 0.203: D24.LED1 40.4,39.13 v40.32,39.05
LEG48
  Top 0.203: J48.1 39.83,40.88 R24.2
LEG49  (via drill 0.3)
  Top 0.203: J49.1 50.7,38.83 v50.48,39.05
  Bottom 0.203: D25.LED1 50.56,39.13 v50.48,39.05
LEG50
  Top 0.203: J50.1 49.99,40.88 R25.2
LEG51  (via drill 0.3)
  Top 0.203: J51.1 60.86,38.83 v60.64,39.05
  Bottom 0.203: D26.LED1 60.72,39.13 v60.64,39.05
LEG52
  Top 0.203: J52.1 60.15,40.88 R26.2
LEG53  (via drill 0.3)
  Top 0.203: J53.1 71.02,38.83 v70.8,39.05
  Bottom 0.203: D27.LED1 70.88,39.13 v70.8,39.05
LEG54
  Top 0.203: J54.1 70.31,40.88 R27.2
LEG55  (via drill 0.3)
  Top 0.203: J55.1 81.18,38.83 v80.96,39.05
  Bottom 0.203: D28.LED1 81.04,39.13 v80.96,39.05
LEG56
  Top 0.203: J56.1 80.47,40.88 R28.2
LEG57  (via drill 0.3)
  Top 0.203: J57.1 20.22,48.99 v20,49.21
  Bottom 0.203: D29.LED1 20.08,49.29 v20,49.21
LEG58
  Top 0.203: J58.1 19.51,51.04 R29.2
LEG59  (via drill 0.3)
  Top 0.203: J59.1 30.38,48.99 v30.16,49.21
  Bottom 0.203: D30.LED1 30.24,49.29 v30.16,49.21
LEG60
  Top 0.203: J60.1 29.67,51.04 R30.2
LEG61  (via drill 0.3)
  Top 0.203: J61.1 40.54,48.99 v40.32,49.21
  Bottom 0.203: D31.LED1 40.4,49.29 v40.32,49.21
LEG62
  Top 0.203: J62.1 39.83,51.04 R31.2
LEG63  (via drill 0.3)
  Top 0.203: J63.1 50.7,48.99 v50.48,49.21
  Bottom 0.203: D32.LED1 50.56,49.29 v50.48,49.21
LEG64
  Top 0.203: J64.1 49.99,51.04 R32.2
LEG65  (via drill 0.3)
  Top 0.203: J65.1 60.86,48.99 v60.64,49.21
  Bottom 0.203: D33.LED1 60.72,49.29 v60.64,49.21
LEG66
  Top 0.203: J66.1 60.15,51.04 R33.2
LEG67  (via drill 0.3)
  Top 0.203: J67.1 71.02,48.99 v70.8,49.21
  Bottom 0.203: D34.LED1 70.88,49.29 v70.8,49.21
LEG68
  Top 0.203: J68.1 70.31,51.04 R34.2
LEG69  (via drill 0.3)
  Top 0.203: J69.1 81.18,48.99 v80.96,49.21
  Bottom 0.203: D35.LED1 81.04,49.29 v80.96,49.21
LEG70
  Top 0.203: J70.1 80.47,51.04 R35.2
LEG71  (via drill 0.3)
  Top 0.203: J71.1 20.22,59.15 v20,59.37
  Bottom 0.203: D36.LED1 20.08,59.45 v20,59.37
LEG72
  Top 0.203: J72.1 19.51,61.2 R36.2
LEG73  (via drill 0.3)
  Top 0.203: J73.1 30.38,59.15 v30.16,59.37
  Bottom 0.203: D37.LED1 30.24,59.45 v30.16,59.37
LEG74
  Top 0.203: J74.1 29.67,61.2 R37.2
LEG75  (via drill 0.3)
  Top 0.203: J75.1 40.54,59.15 v40.32,59.37
  Bottom 0.203: D38.LED1 40.4,59.45 v40.32,59.37
LEG76
  Top 0.203: J76.1 39.83,61.2 R38.2
LEG77  (via drill 0.3)
  Top 0.203: J77.1 50.7,59.15 v50.48,59.37
  Bottom 0.203: D39.LED1 50.56,59.45 v50.48,59.37
LEG78
  Top 0.203: J78.1 49.99,61.2 R39.2
LEG79  (via drill 0.3)
  Top 0.203: J79.1 60.86,59.15 v60.64,59.37
  Bottom 0.203: D40.LED1 60.72,59.45 v60.64,59.37
LEG80
  Top 0.203: J80.1 60.15,61.2 R40.2
LEG81  (via drill 0.3)
  Top 0.203: J81.1 71.02,59.15 v70.8,59.37
  Bottom 0.203: D41.LED1 70.88,59.45 v70.8,59.37
LEG82
  Top 0.203: J82.1 70.31,61.2 R41.2
LEG83  (via drill 0.3)
  Top 0.203: J83.1 81.18,59.15 v80.96,59.37
  Bottom 0.203: D42.LED1 81.04,59.45 v80.96,59.37
LEG84
  Top 0.203: J84.1 80.47,61.2 R42.2
LEG85  (via drill 0.3)
  Top 0.203: J85.1 20.22,69.31 v20,69.53
  Bottom 0.203: D43.LED1 20.08,69.61 v20,69.53
LEG86
  Top 0.203: J86.1 19.51,71.36 R43.2
LEG87  (via drill 0.3)
  Top 0.203: J87.1 30.38,69.31 v30.16,69.53
  Bottom 0.203: D44.LED1 30.24,69.61 v30.16,69.53
LEG88
  Top 0.203: J88.1 29.67,71.36 R44.2
LEG89  (via drill 0.3)
  Top 0.203: J89.1 40.54,69.31 v40.32,69.53
  Bottom 0.203: D45.LED1 40.4,69.61 v40.32,69.53
LEG90
  Top 0.203: J90.1 39.83,71.36 R45.2
LEG91  (via drill 0.3)
  Top 0.203: J91.1 50.7,69.31 v50.48,69.53
  Bottom 0.203: D46.LED1 50.56,69.61 v50.48,69.53
LEG92
  Top 0.203: J92.1 49.99,71.36 R46.2
LEG93  (via drill 0.3)
  Top 0.203: J93.1 60.86,69.31 v60.64,69.53
  Bottom 0.203: D47.LED1 60.72,69.61 v60.64,69.53
LEG94
  Top 0.203: J94.1 60.15,71.36 R47.2
LEG95  (via drill 0.3)
  Top 0.203: J95.1 71.02,69.31 v70.8,69.53
  Bottom 0.203: D48.LED1 70.88,69.61 v70.8,69.53
LEG96
  Top 0.203: J96.1 70.31,71.36 R48.2
LEG97  (via drill 0.3)
  Top 0.203: J97.1 81.18,69.31 v80.96,69.53
  Bottom 0.203: D49.LED1 81.04,69.61 v80.96,69.53
LEG98
  Top 0.203: J98.1 80.47,71.36 R49.2
RLEG1  (via drill 0.3)
  Top 0.203: v31.18,11.24 31.18,10.98 R1.1
  Bottom 0.203: v31.18,11.24 31.18,11.54 D2.LED2
RLEG2  (via drill 0.3)
  Top 0.203: v21.02,11.24 21.02,10.98 R2.1
  Bottom 0.203: v21.02,11.24 21.02,11.54 D1.LED2
RLEG3  (via drill 0.3)
  Top 0.203: v41.34,11.24 41.34,10.98 R3.1
  Bottom 0.203: v41.34,11.24 41.34,11.54 D3.LED2
RLEG4  (via drill 0.3)
  Top 0.203: v51.5,11.24 51.5,10.98 R4.1
  Bottom 0.203: v51.5,11.24 51.5,11.54 D4.LED2
RLEG5  (via drill 0.3)
  Top 0.203: v61.66,11.24 61.66,10.98 R5.1
  Bottom 0.203: v61.66,11.24 61.66,11.54 D5.LED2
RLEG6  (via drill 0.3)
  Top 0.203: v71.82,11.24 71.82,10.98 R6.1
  Bottom 0.203: v71.82,11.24 71.82,11.54 D6.LED2
RLEG7  (via drill 0.3)
  Top 0.203: v81.98,11.24 81.98,10.98 R7.1
  Bottom 0.203: v81.98,11.24 81.98,11.54 D7.LED2
RLEG8  (via drill 0.3)
  Top 0.203: v21.02,21.4 21.02,21.14 R8.1
  Bottom 0.203: v21.02,21.4 21.02,21.7 D8.LED2
RLEG9  (via drill 0.3)
  Top 0.203: v31.18,21.4 31.18,21.14 R9.1
  Bottom 0.203: v31.18,21.4 31.18,21.7 D9.LED2
RLEG10  (via drill 0.3)
  Top 0.203: v41.34,21.4 41.34,21.14 R10.1
  Bottom 0.203: v41.34,21.4 41.34,21.7 D10.LED2
RLEG11  (via drill 0.3)
  Top 0.203: v51.5,21.4 51.5,21.14 R11.1
  Bottom 0.203: v51.5,21.4 51.5,21.7 D11.LED2
RLEG12  (via drill 0.3)
  Top 0.203: v61.66,21.4 61.66,21.14 R12.1
  Bottom 0.203: v61.66,21.4 61.66,21.7 D12.LED2
RLEG13  (via drill 0.3)
  Top 0.203: v71.82,21.4 71.82,21.14 R13.1
  Bottom 0.203: v71.82,21.4 71.82,21.7 D13.LED2
RLEG14  (via drill 0.3)
  Top 0.203: v81.98,21.4 81.98,21.14 R14.1
  Bottom 0.203: v81.98,21.4 81.98,21.7 D14.LED2
RLEG15  (via drill 0.3)
  Top 0.203: v21.02,31.56 21.02,31.3 R15.1
  Bottom 0.203: v21.02,31.56 21.02,31.86 D15.LED2
RLEG16  (via drill 0.3)
  Top 0.203: v31.18,31.56 31.18,31.3 R16.1
  Bottom 0.203: v31.18,31.56 31.18,31.86 D16.LED2
RLEG17  (via drill 0.3)
  Top 0.203: v41.34,31.56 41.34,31.3 R17.1
  Bottom 0.203: v41.34,31.56 41.34,31.86 D17.LED2
RLEG18  (via drill 0.3)
  Top 0.203: v51.5,31.56 51.5,31.3 R18.1
  Bottom 0.203: v51.5,31.56 51.5,31.86 D18.LED2
RLEG19  (via drill 0.3)
  Top 0.203: v61.66,31.56 61.66,31.3 R19.1
  Bottom 0.203: v61.66,31.56 61.66,31.86 D19.LED2
RLEG20  (via drill 0.3)
  Top 0.203: v71.82,31.56 71.82,31.3 R20.1
  Bottom 0.203: v71.82,31.56 71.82,31.86 D20.LED2
RLEG21  (via drill 0.3)
  Top 0.203: v81.98,31.56 81.98,31.3 R21.1
  Bottom 0.203: v81.98,31.56 81.98,31.86 D21.LED2
RLEG22  (via drill 0.3)
  Top 0.203: v21.02,41.72 21.02,41.46 R22.1
  Bottom 0.203: v21.02,41.72 21.02,42.02 D22.LED2
RLEG23  (via drill 0.3)
  Top 0.203: v31.18,41.72 31.18,41.46 R23.1
  Bottom 0.203: v31.18,41.72 31.18,42.02 D23.LED2
RLEG24  (via drill 0.3)
  Top 0.203: v41.34,41.72 41.34,41.46 R24.1
  Bottom 0.203: v41.34,41.72 41.34,42.02 D24.LED2
RLEG25  (via drill 0.3)
  Top 0.203: v51.5,41.72 51.5,41.46 R25.1
  Bottom 0.203: v51.5,41.72 51.5,42.02 D25.LED2
RLEG26  (via drill 0.3)
  Top 0.203: v61.66,41.72 61.66,41.46 R26.1
  Bottom 0.203: v61.66,41.72 61.66,42.02 D26.LED2
RLEG27  (via drill 0.3)
  Top 0.203: v71.82,41.72 71.82,41.46 R27.1
  Bottom 0.203: v71.82,41.72 71.82,42.02 D27.LED2
RLEG28  (via drill 0.3)
  Top 0.203: v81.98,41.72 81.98,41.46 R28.1
  Bottom 0.203: v81.98,41.72 81.98,42.02 D28.LED2
RLEG29  (via drill 0.3)
  Top 0.203: v21.02,51.88 21.02,51.62 R29.1
  Bottom 0.203: v21.02,51.88 21.02,52.18 D29.LED2
RLEG30  (via drill 0.3)
  Top 0.203: v31.18,51.88 31.18,51.62 R30.1
  Bottom 0.203: v31.18,51.88 31.18,52.18 D30.LED2
RLEG31  (via drill 0.3)
  Top 0.203: v41.34,51.88 41.34,51.62 R31.1
  Bottom 0.203: v41.34,51.88 41.34,52.18 D31.LED2
RLEG32  (via drill 0.3)
  Top 0.203: v51.5,51.88 51.5,51.62 R32.1
  Bottom 0.203: v51.5,51.88 51.5,52.18 D32.LED2
RLEG33  (via drill 0.3)
  Top 0.203: v61.66,51.88 61.66,51.62 R33.1
  Bottom 0.203: v61.66,51.88 61.66,52.18 D33.LED2
RLEG34  (via drill 0.3)
  Top 0.203: v71.82,51.88 71.82,51.62 R34.1
  Bottom 0.203: v71.82,51.88 71.82,52.18 D34.LED2
RLEG35  (via drill 0.3)
  Top 0.203: v81.98,51.88 81.98,51.62 R35.1
  Bottom 0.203: v81.98,51.88 81.98,52.18 D35.LED2
RLEG36  (via drill 0.3)
  Top 0.203: v21.02,62.04 21.02,61.78 R36.1
  Bottom 0.203: v21.02,62.04 21.02,62.34 D36.LED2
RLEG37  (via drill 0.3)
  Top 0.203: v31.18,62.04 31.18,61.78 R37.1
  Bottom 0.203: v31.18,62.04 31.18,62.34 D37.LED2
RLEG38  (via drill 0.3)
  Top 0.203: v41.34,62.04 41.34,61.78 R38.1
  Bottom 0.203: v41.34,62.04 41.34,62.34 D38.LED2
RLEG39  (via drill 0.3)
  Top 0.203: v51.5,62.04 51.5,61.78 R39.1
  Bottom 0.203: v51.5,62.04 51.5,62.34 D39.LED2
RLEG40  (via drill 0.3)
  Top 0.203: v61.66,62.04 61.66,61.78 R40.1
  Bottom 0.203: v61.66,62.04 61.66,62.34 D40.LED2
RLEG41  (via drill 0.3)
  Top 0.203: v71.82,62.04 71.82,61.78 R41.1
  Bottom 0.203: v71.82,62.04 71.82,62.34 D41.LED2
RLEG42  (via drill 0.3)
  Top 0.203: v81.98,62.04 81.98,61.78 R42.1
  Bottom 0.203: v81.98,62.04 81.98,62.34 D42.LED2
RLEG43  (via drill 0.3)
  Top 0.203: v21.02,72.2 21.02,71.94 R43.1
  Bottom 0.203: v21.02,72.2 21.02,72.5 D43.LED2
RLEG44  (via drill 0.3)
  Top 0.203: v31.18,72.2 31.18,71.94 R44.1
  Bottom 0.203: v31.18,72.2 31.18,72.5 D44.LED2
RLEG45  (via drill 0.3)
  Top 0.203: v41.34,72.2 41.34,71.94 R45.1
  Bottom 0.203: v41.34,72.2 41.34,72.5 D45.LED2
RLEG46  (via drill 0.3)
  Top 0.203: v51.5,72.2 51.5,71.94 R46.1
  Bottom 0.203: v51.5,72.2 51.5,72.5 D46.LED2
RLEG47  (via drill 0.3)
  Top 0.203: v61.66,72.2 61.66,71.94 R47.1
  Bottom 0.203: v61.66,72.2 61.66,72.5 D47.LED2
RLEG48  (via drill 0.3)
  Top 0.203: v71.82,72.2 71.82,71.94 R48.1
  Bottom 0.203: v71.82,72.2 71.82,72.5 D48.LED2
RLEG49  (via drill 0.3)
  Top 0.203: v81.98,72.2 81.98,71.94 R49.1
  Bottom 0.203: v81.98,72.2 81.98,72.5 D49.LED2

## Text on the board
Dimension: vscore | Mill Out | Mill Out | Mill Out | Mill Out | Mill Out | Mill Out | Mill Out | Mill Out | Mill Out | Mill Out | Mill Out | Mill Out | Mill Out | Mill Out | vscore | vscore | Mill Out | Mill Out | Mill Out | Mill Out | Mill Out | Mill Out | Mill Out | Mill Out | Mill Out | Mill Out | Mill Out | Mill Out | Mill Out | Mill Out | vscore | vscore | Mill Out | Mill Out | Mill Out | Mill Out | Mill Out | Mill Out | Mill Out | Mill Out | Mill Out | Mill Out | Mill Out | Mill Out | Mill Out | Mill Out | vscore | vscore | Mill Out | Mill Out | Mill Out | Mill Out | Mill Out | Mill Out | Mill Out | Mill Out | Mill Out | Mill Out | Mill Out | Mill Out | Mill Out | Mill Out | vscore | vscore | Mill Out | Mill Out | Mill Out | Mill Out | Mill Out | Mill Out | Mill Out | Mill Out | Mill Out | Mill Out | Mill Out | Mill Out | Mill Out | Mill Out | vscore | vscore | Mill Out | Mill Out | Mill Out | Mill Out | Mill Out | Mill Out | Mill Out | Mill Out | Mill Out | Mill Out | Mill Out | Mill Out | Mill Out | Mill Out | vscore | vscore | Mill Out | Mill Out | Mill Out | Mill Out | Mill Out | Mill Out | Mill Out | Mill Out | Mill Out | Mill Out | Mill Out | Mill Out | Mill Out | Mill Out | vscore
JigTopSilk: BuildUpons Jig v1.0 11/24/2017